# EAGLE board LM386-audio-amp (EAGLE 5.07)
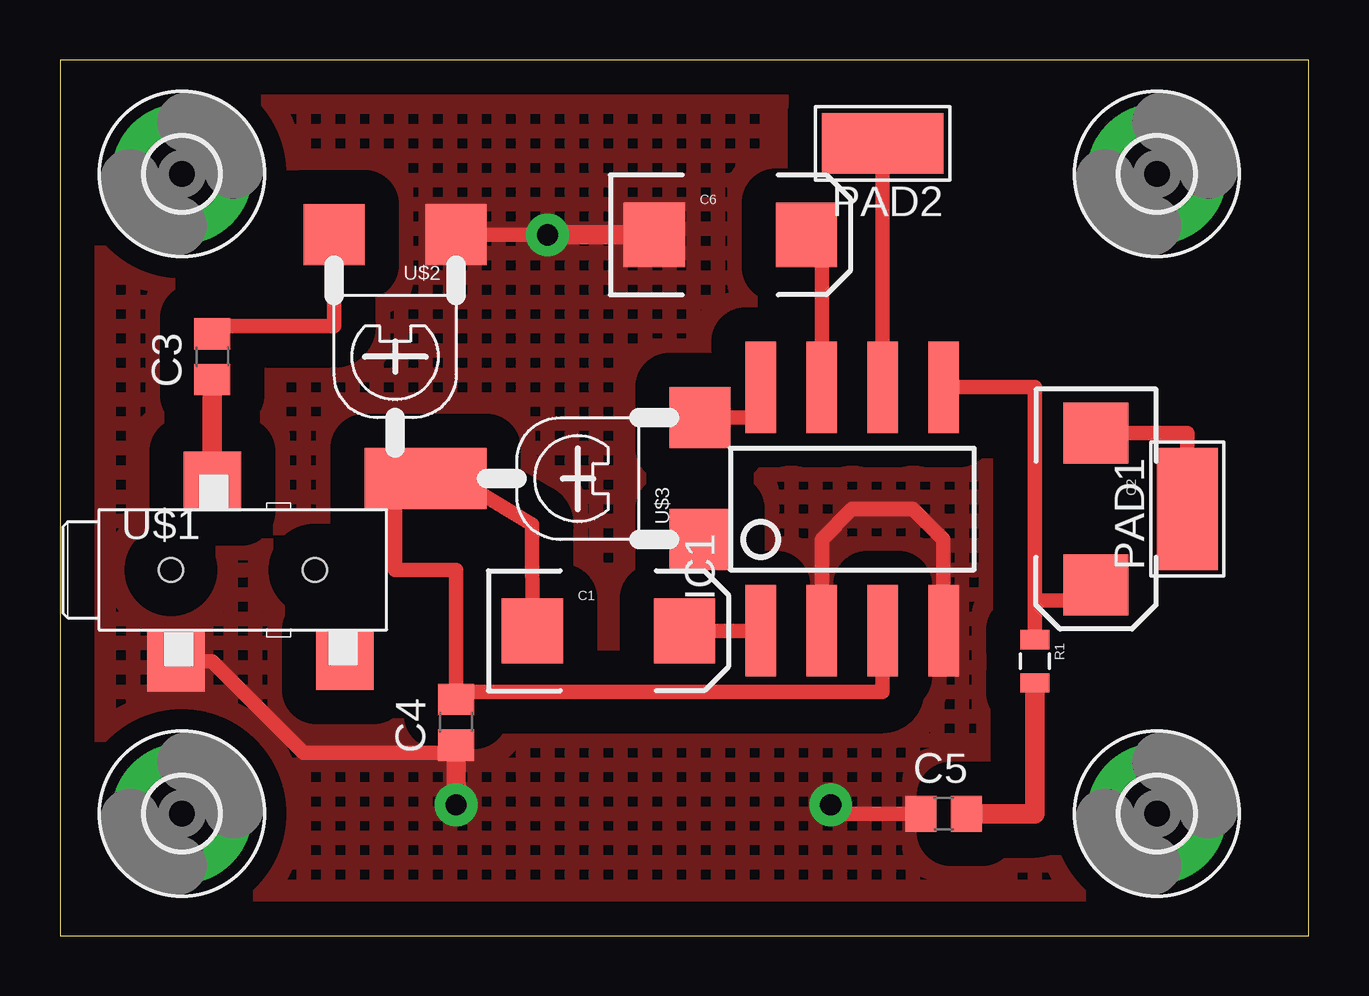
[diagram p0: board, top side]
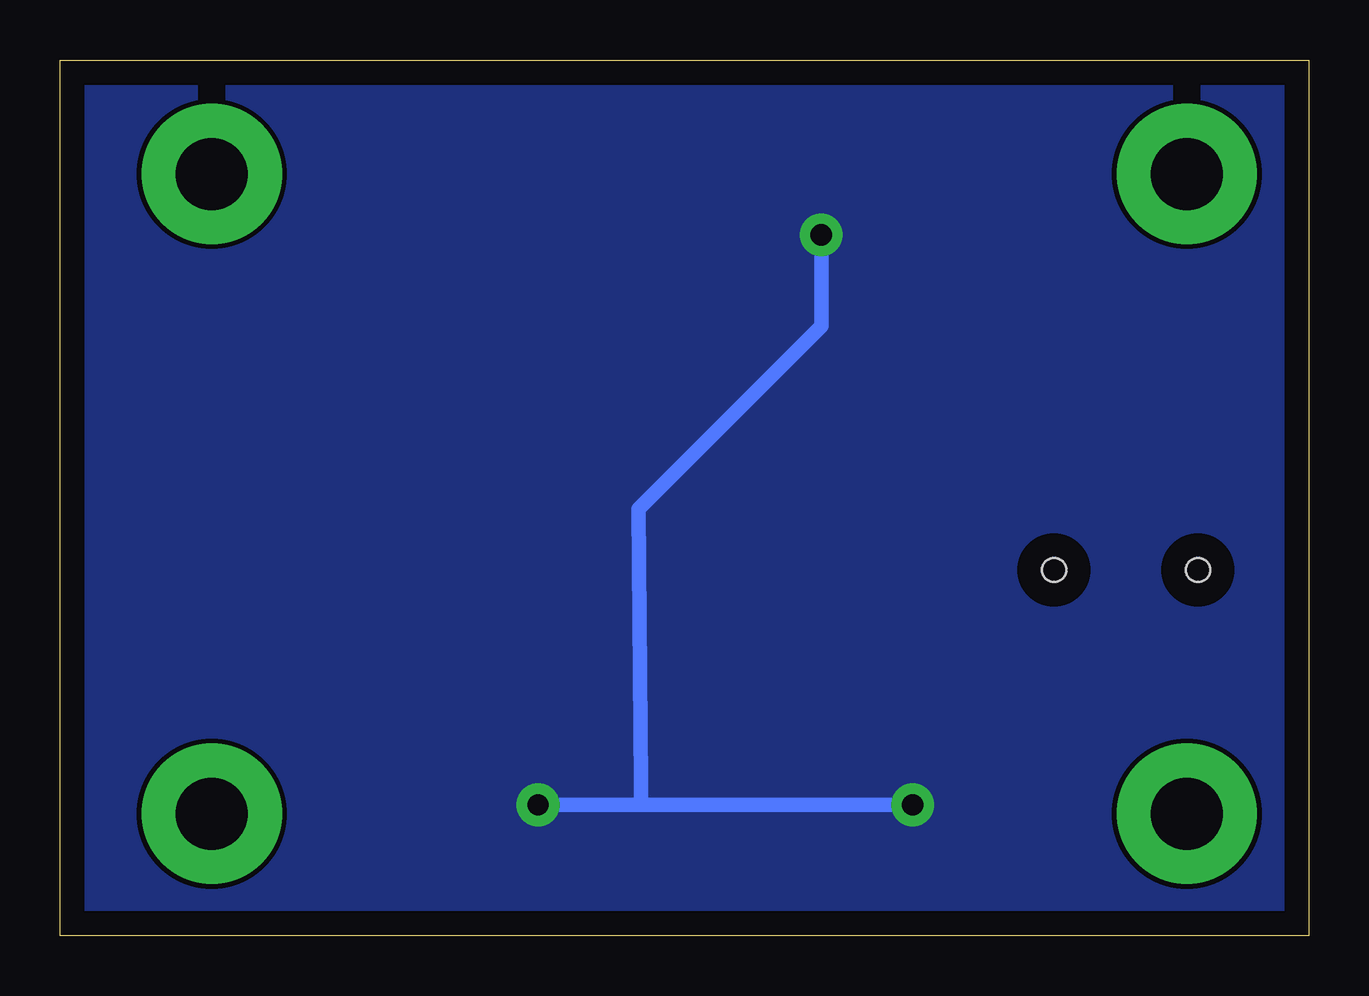
[diagram p1: board, bottom side, seen from below]

Size 52.05 x 36.5 mm. Coordinates in mm from the lower left corner, seen from the top.
Outline: 0,0 52.05,0 52.05,36.5 0,36.5 0,0
Copper layers (1*16): Top 0.035mm / dielectric 1.5mm / Bottom 0.035mm
Design rules "default": minimum track width 10mil, minimum drill 24mil, track to track 8mil, track to pad 8mil, pad to pad 8mil, via to via 8mil, smd to smd 8mil, copper to edge 40mil, drill to drill 8mil, minimum pad ring 10mil, minimum via ring 8mil, stop-mask expansion 4mil, vias tented up to drill 0mil, thermal gap 10mil

## Footprints (pad centres in the part's own frame; a part is rotated, then mirrored left to right if it is on the bottom)
EIA7343 = smd 2.55 x 2.7: A 3.17,0; C -3.17,0
C0805 = smd 1.3 x 1.5: 1 -0.95,0; 2 0.95,0
3,0-PAD = drill 3 pad 5.842 round: B3,0 0,0
DIP8-RF = smd 1.27 x 3.81: P$1 0,-3.81; P$2 2.54,-3.81; P$3 5.08,-3.81; P$4 7.62,-3.81; P$5 7.62,6.35; P$6 5.08,6.35; P$7 2.54,6.35; P$8 0,6.35
5-2,5 = smd 2.54 x 5.08: 1 0,0
0805 = smd 0.8 x 1.2: 1 -0.9,0; 2 0.9,0
MIN-AUDIO-3.5MM = smd 2.4 x 2.5: 1 -2.794,-3.81; 2 4.257,-3.754; 3 -1.27,3.683 | hole 1: -3,0; 3,0
POT_SMD_BLUE_WHITE = smd 2.54 x 2.54: A -2.54,-5.08; E 2.54,-5.08; S 0,5.08

## Placement (x,y rotation side)
C1  100uF  [EIA7343]  22.86,12.7 0 top
C2  100uF  [EIA7343]  43.18,17.78 270 top
C3  1uF  [C0805]  6.35,24.13 90 top
C4  104  [C0805]  16.51,8.89 90 top
C5  473  [C0805]  36.83,5.08 0 top
C6  10uF  [EIA7343]  27.94,29.21 0 top
H1  MOUNT-PAD-ROUND3.0  [3,0-PAD]  5.08,5.08 0 top
H2  MOUNT-PAD-ROUND3.0  [3,0-PAD]  45.72,31.75 0 top
H3  MOUNT-PAD-ROUND3.0  [3,0-PAD]  45.72,5.08 0 top
H4  MOUNT-PAD-ROUND3.0  [3,0-PAD]  5.08,31.75 0 top
IC1  LM386-DIP_SMD  [DIP8-RF]  29.21,16.51 0 top
PAD1  WIREPADSMD5-2,5  [5-2,5]  46.99,17.78 0 top
PAD2  WIREPADSMD5-2,5  [5-2,5]  34.29,33.02 90 top
R1  10  [0805]  40.64,11.43 270 top
U$1  AUDIO-JACK-MINI-A3.5  [MIN-AUDIO-3.5MM]  7.62,15.24 0 top
U$2  10k  [POT_SMD_BLUE_WHITE]  13.97,24.13 180 top
U$3  10k  [POT_SMD_BLUE_WHITE]  21.59,19.05 90 top

## Library data of the parts
C1-C6 IC1 R1 U$1-U$3 = digital-toy
H1-H4 = holes
PAD1 PAD2 = wirepad

## Nets
GND: C4.1 C5.1 C6.C IC1.P$2 IC1.P$4 U$1.1 U$2.A
N$1: C3.1 U$1.3
N$2: C3.2 U$2.E
N$3: C4.2 IC1.P$3 U$2.S
N$4: C6.A IC1.P$7
N$6: C2.A IC1.P$5 R1.1
N$7: C5.2 R1.2
N$8: C2.C PAD1.1
N$9: C1.A IC1.P$1
N$10: C1.C U$3.S
N$11: IC1.P$8 U$3.E
VCC: IC1.P$6 PAD2.1

## Tracks (layer width: path | path; a pad name or v marks a point on that pad's centre or on a via)
GND  (via drill 0.89 pad 1.78)
  Top 0.61: v20.32,29.21 U$2.A | U$1.1 6.35,11.43 10.16,7.62 16.14,7.62 C4.1 | IC1.P$4 36.83,16.51 35.56,17.78 33.02,17.78 31.75,16.51 IC1.P$2 | C5.1 32.49,5.08 v32.12,5.45
  Top 0.813: C4.1 v16.51,5.45 | v20.32,29.21 C6.C
  Bottom 0.254: 27.82,6.35 27.94,6.35
  Bottom 0.61: v16.51,5.45 27.94,5.45 | 27.94,5.45 v32.12,5.45 | v20.32,29.21 20.32,25.4 27.94,17.78 27.82,6.35 27.82,5.57 27.94,5.45
  pour Bottom: 0,49.53 66.04,49.53 73.66,41.91 72.39,-8.89 72.39,-15.24 48.26,-19.05 -10.16,-19.05 -7.62,41.91
  pour Top (isolate 1.422, no thermals, hatched): -3.81,50.8 55.88,49.53 69.85,35.56 71.12,-2.54 63.5,-15.24 -10.16,-12.7 -8.89,31.75 -8.89,45.72
N$1
  Top 0.813: U$1.3 C3.1
N$2
  Top 0.61: C3.2 6.35,25.4 11.43,25.4 U$2.E
N$3
  Top 0.61: U$2.S 13.97,15.24 16.51,15.24 16.51,10.16 34.29,10.16 IC1.P$3
  Top 0.813: C4.2 16.51,10.16
N$4
  Top 0.61: C6.A 31.75,27.94 IC1.P$7
N$6
  Top 0.61: C2.A 43.18,13.97 40.64,13.97 | R1.1 40.64,13.97 | IC1.P$5 40.64,22.86 40.64,13.97
N$7
  Top 0.813: R1.2 40.64,5.08 C5.2
N$8
  Top 0.61: PAD1.1 46.99,20.95 C2.C
N$9
  Top 0.61: C1.A IC1.P$1
N$10
  Top 0.61: U$3.S 19.68,17.14 C1.C
N$11
  Top 0.61: U$3.E 29.21,21.59 IC1.P$8
VCC
  Top 0.61: IC1.P$6 PAD2.1
  Top 0.813: PAD2.1 35.56,33.02